# Altium PCB PCB1.PcbDoc
Units mm, origin at the board's own origin, x right, y up, seen from the top; angles counter-clockwise.
Board outline 59.87 x 40 mm, 2 copper layers (Top Layer, Bottom Layer); 39 components, 48 nets, 158 pads, 71 vias.
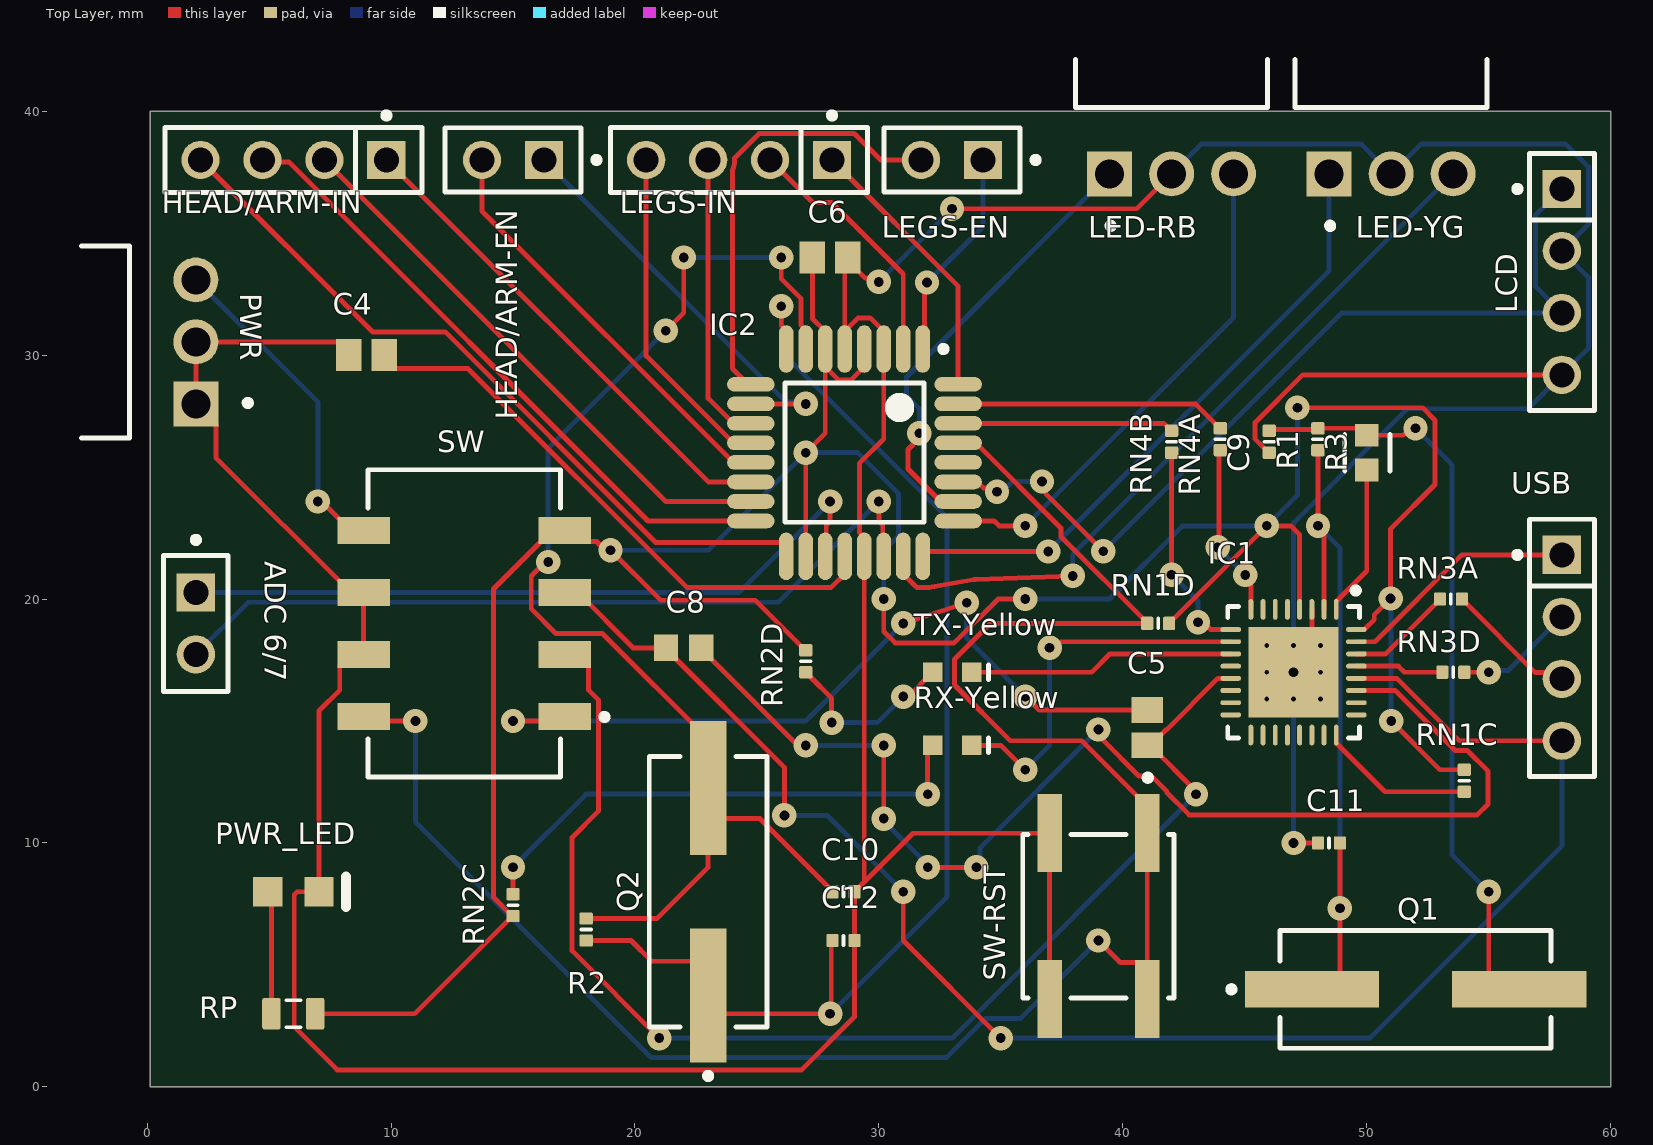
[diagram p0: Top Layer view]
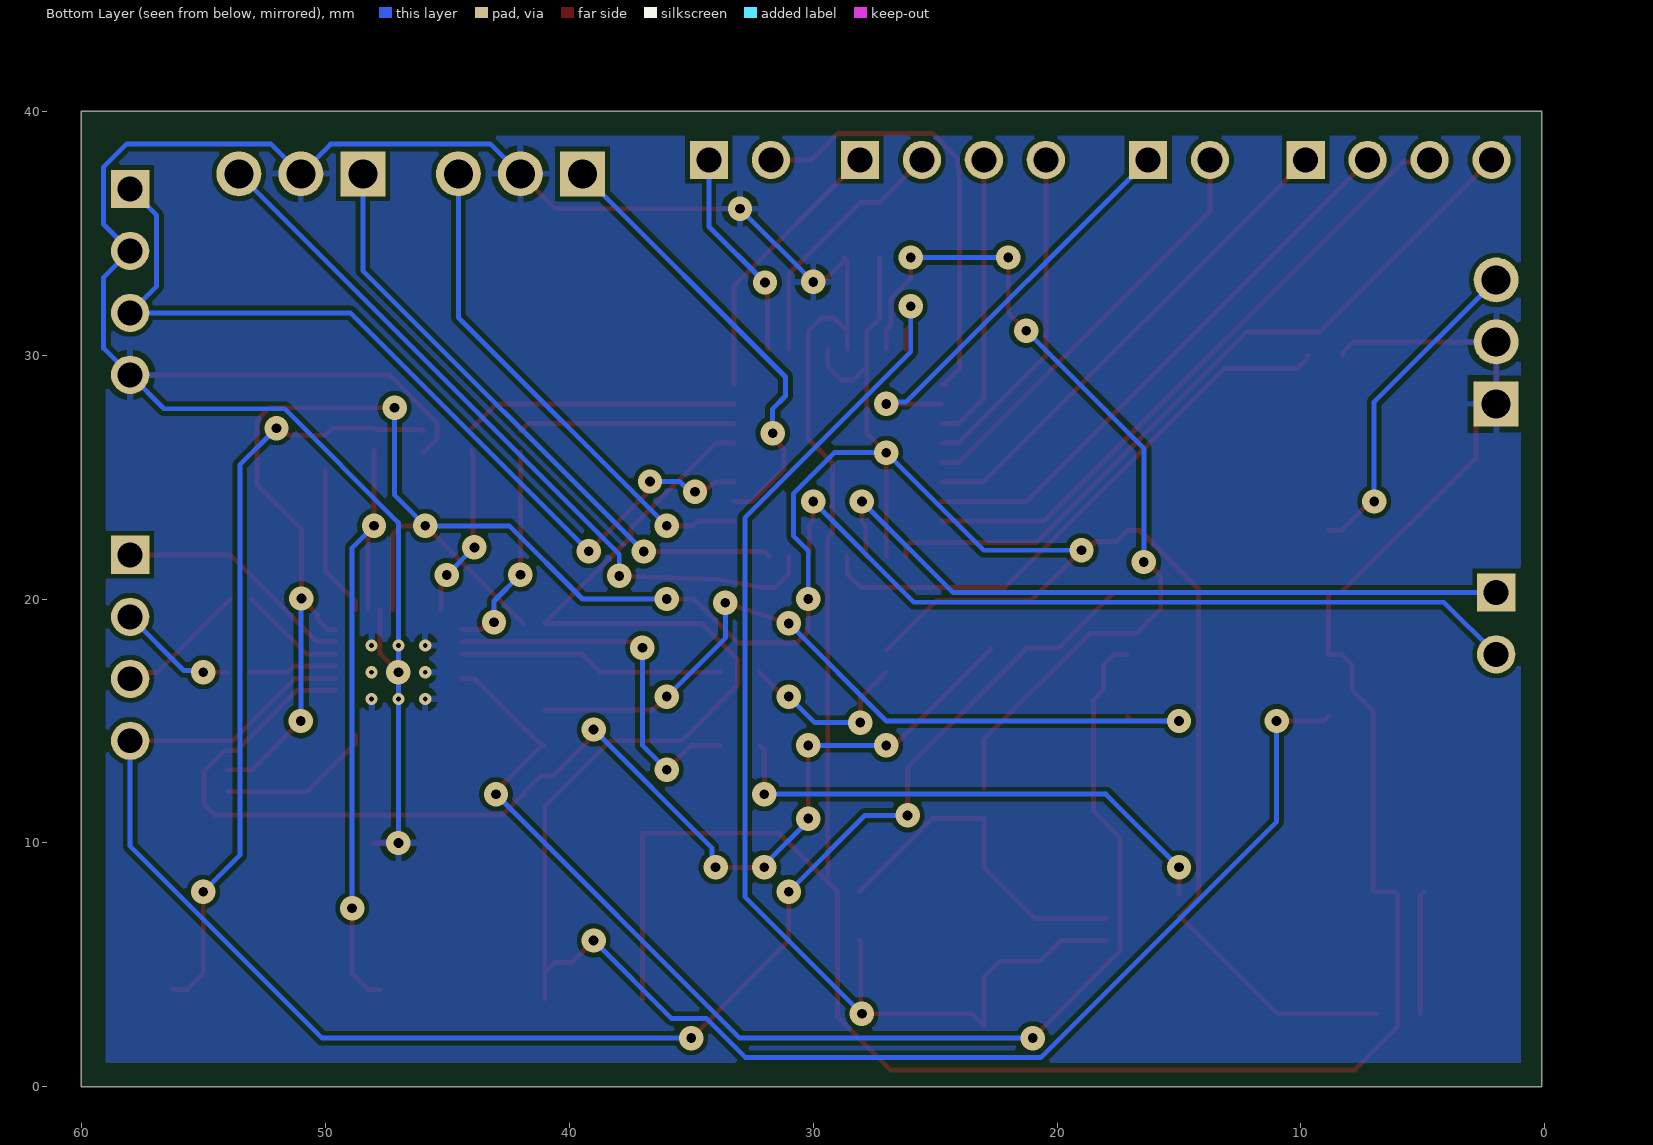
[diagram p1: Bottom Layer view, seen from below]
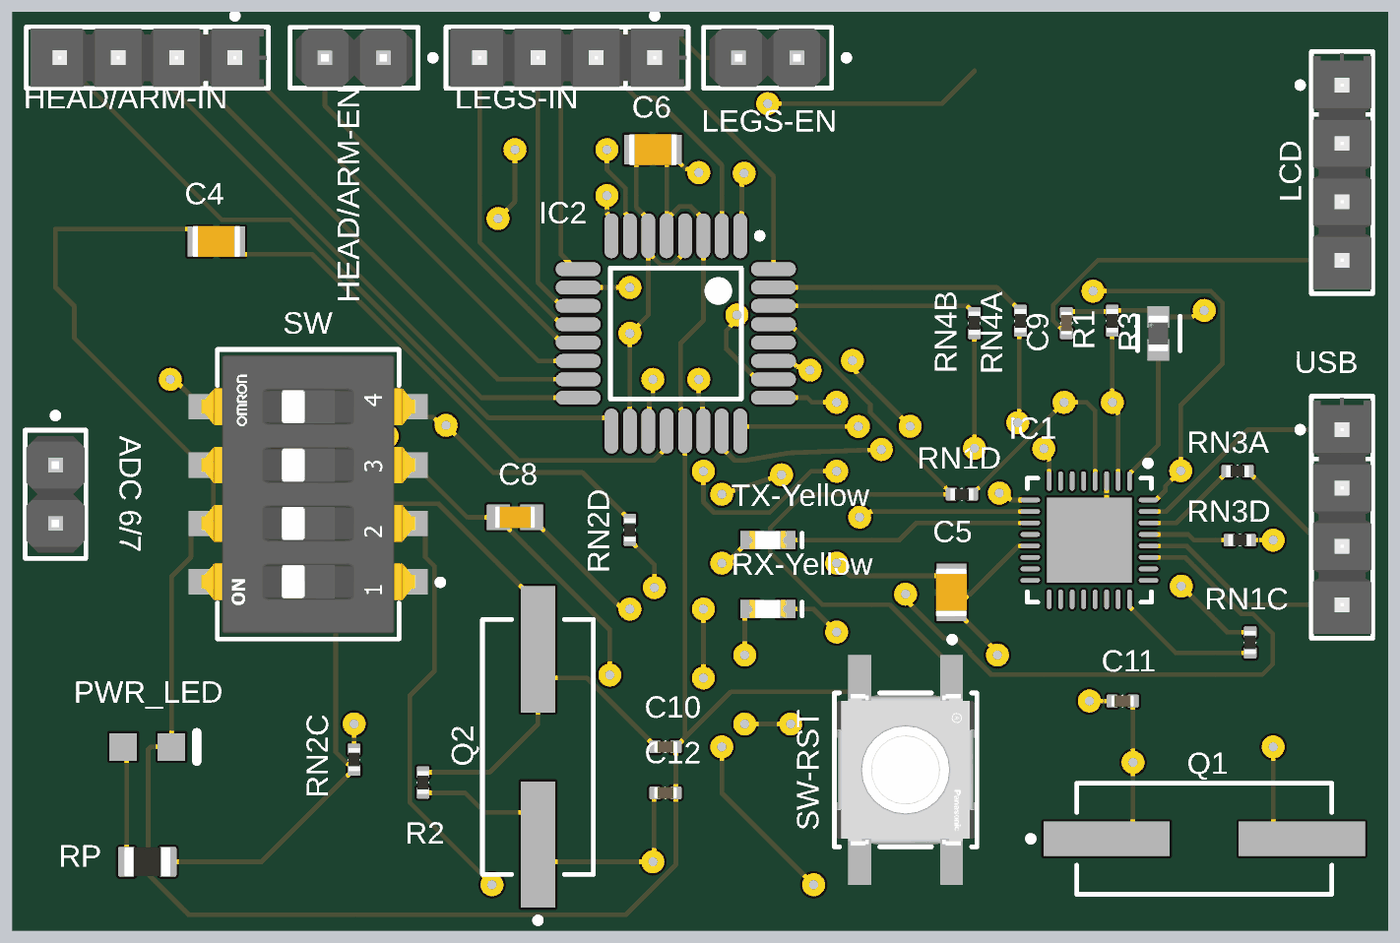
[diagram p2: 3D render of the assembled board from above, using the file's embedded part models]

## Layer stack, top to bottom
Top Solder: solder mask 0.0102, Solder Resist, Dk 3.5
Top Layer: signal copper 0.0356
Dielectric 1: dielectric 0.32, FR-4, Dk 4.8
Bottom Layer: signal copper 0.0356
Bottom Solder: solder mask 0.0102, Solder Resist, Dk 3.5

## Board outline
0.127,0 60,0 60,40 0.127,40

## Design rules (kind name [scope] priority, off if disabled: settings)
Clearance [All] p1: gap=0.2 ignorepadtopadclearanceinfootprint=TRUE
PolygonConnect [All] p1: connectstyle=Relief reliefconductorwidth=0.254 reliefentries=4 polygonreliefangle="90 Angle" airgapwidth=0.254
RoutingVias [All] p1: holewidth=0.4 width=1 viastyle="Through Hole" minholewidth=0.4 minwidth=1 maxholewidth=0.4 maxwidth=1
SMDNeckDown [All] p1: percent=50.000
SolderMaskExpansion [All] p1: expansion=0.102 istentingtop=FALSE
UnRoutedNet [All] p1: checkbadconnections=TRUE
Width [All] p1: maxlimit=0.3 minlimit=0.2 preferedwidth=0.2
29 further rules are at their usual default settings.

## Components (designator, comment, footprint, x,y, rotation, side; value= is the part's Value field where it differs from the comment)
"ADC 6/7" "M20-9990246" FP-M20-9990246-MFG 2,19 r270 top
C4 "Capacitor 100 nF +/-10% 50 V 0805" CAPC2013X95X50LL10T25 9,30 r0 top value=100nF
C5 "Capacitor 100 nF +/-10% 50 V 0805" CAPC2013X95X50LL10T25 41,14.725 r270 top value=100nF
C6 "Capacitor 100 nF +/-10% 50 V 0805" CAPC2013X95X50LL10T25 28,34 r180 top value=100nF
C8 "Capacitor 1uF +/- 10% 16V 0603" CAPC1608X90X35ML15T15 22,18 r0 top value=1µF
C9 "Capacitor 22pF +/-10% 50V 0402" CAPC0402(1005)60_L 46,26.45 r90 top value=22pF
C10 "Capacitor 22pF +/-10% 50V 0402" CAPC0402(1005)60_L 28.55,8 r0 top value=22pF
C11 "Capacitor 22pF +/-10% 50V 0402" CAPC0402(1005)60_L 48.45,10 r0 top value=22pF
C12 "Capacitor 22pF +/-10% 50V 0402" CAPC0402(1005)60_L 28.55,6 r0 top value=22pF
HEAD/ARM-EN "M20-9990246" FP-M20-9990246-MFG 15,38 r180 top
HEAD/ARM-IN "TSW-104-23-T-S" FP-TSW-104-23-T-S-MFG 6,38 r180 top
IC1 "ATmega8U2-MU" 32PG_M 47,17 r270 top
IC2 "ATmega328P-AU" 32A_M 29,26 r270 top
LCD "TSW-104-23-T-S" FP-TSW-104-23-T-S-MFG 58,33 r270 top
LED-RB "22-05-7038" FP-22-05-7038-MFG 42,46 r0 top
LED-YG "22-05-7038" FP-22-05-7038-MFG 51,46 r0 top
LEGS-EN "M20-9990246" FP-M20-9990246-MFG 33,38 r180 top
LEGS-IN "TSW-104-23-T-S" FP-TSW-104-23-T-S-MFG 24.27,38 r180 top
PWR "22-05-7038" FP-22-05-7038-MFG -6.57,30.54 r90 top
PWR_LED "HSMG-C170" AVAG-HSMX-C170_V 6,8 r0 top
Q1 "ATS16ASM-1" CTS-ATS-SM-XTAL-2 52,4 r0 top
Q2 "ATS16ASM-1" CTS-ATS-SM-XTAL-2 23,8 r90 top
R1 "Resistor 1M +/-5 % 0402 63 mW" RESC0402(1005)_L 48,26.55 r90 top value=1M
R2 "Resistor 1M +/-5 % 0402 63 mW" RESC0402(1005)_L 18,6.45 r90 top value=1M
R3 "CRCW060327R0JNEA" FP-CRCW0603-e3-IPC_B 50,26 r90 top
RN1C "Resistor 10K  +/-1 % 0402 63 mW" RESC0402(1005)_L 54,12.55 r90 top value=10k
RN1D "Resistor 10K  +/-1 % 0402 63 mW" RESC0402(1005)_L 41.45,19 r180 top value=10k
RN2C "Resistor 1K +/-5 % 0402 63 mW" RESC0402(1005)_L 15,7.45 r270 top value=1k
RN2D "Resistor 1K +/-5 % 0402 63 mW" RESC0402(1005)_L 27,17.45 r90 top value=1k
RN3A "Resistor 22R  +/-5 % 0402 63 mW" RESC0402(1005)_L 53.45,20 r180 top value=22
RN3D "Resistor 22R  +/-5 % 0402 63 mW" RESC0402(1005)_L 53.55,17 r180 top value=22
RN4A "Resistor 1K +/-5 % 0402 63 mW" RESC0402(1005)_L 44,26.55 r90 top value=1k
RN4B "Resistor 1K +/-5 % 0402 63 mW" RESC0402(1005)_L 42,26.45 r90 top value=1k
RP "Resistor 1K +/-5% 0805 125 mW" RESC0805(2012)_L 6,3 r0 top value=1k
RX-Yellow "150060YS75000" 0603_A 33,14 r180 top
SW "A6SN-4101" FP-A6SN-4101-MFG 13,19 r180 top
SW-RST "EVQ-Q2P03W" FP-EVQ-Q2P03W-MFG 39,7 r270 top
TX-Yellow "150060YS75000" 0603_A 33,17 r180 top
USB "TSW-104-23-T-S" FP-TSW-104-23-T-S-MFG 58,18 r270 top

## Footprints (in the part's own frame and the unit in brackets; to place one, negate y for a bottom-side part, rotate by r counter-clockwise, add the part's x,y. Pads: shape width x height; smd on the part's side, far side on the other; paste and mask are expansions set on the pad)
32A_M [mm] "Thin QFP, 32-Leads, Body 7x7mm, Pitch 0.8mm, IPC Low Density"
  oval 1.95x0.6 smd: 1(-4.25,2.8) 2(-4.25,2) 3(-4.25,1.2) 4(-4.25,0.4) 5(-4.25,-0.4) 6(-4.25,-1.2) 7(-4.25,-2) 8(-4.25,-2.8) 17(4.25,-2.8) 18(4.25,-2) 19(4.25,-1.2) 20(4.25,-0.4) 21(4.25,0.4) 22(4.25,1.2) 23(4.25,2) 24(4.25,2.8)
  oval 0.6x1.95 smd: 9(-2.8,-4.25) 10(-2,-4.25) 11(-1.2,-4.25) 12(-0.4,-4.25) 13(0.4,-4.25) 14(1.2,-4.25) 15(2,-4.25) 16(2.8,-4.25) 25(2.8,4.25) 26(2,4.25) 27(1.2,4.25) 28(0.4,4.25) 29(-0.4,4.25) 30(-1.2,4.25) 31(-2,4.25) 32(-2.8,4.25)
  silkscreen extent -4.37,-2.85 2.85,3.78, body extent -3.5,-3.5 3.5,3.5, height 1.2
32PG_M [mm] "QFN, 32-Leads, Body 5x5mm, Pitch 0.5mm, Thermal Pad 3.7x3.7mm, IPC Low Density"
  oval 0.85x0.2 smd: 1(-2.575,1.75) 2(-2.575,1.25) 3(-2.575,0.75) 4(-2.575,0.25) 5(-2.575,-0.25) 6(-2.575,-0.75) 7(-2.575,-1.25) 8(-2.575,-1.75) 17(2.575,-1.75) 18(2.575,-1.25) 19(2.575,-0.75) 20(2.575,-0.25) 21(2.575,0.25) 22(2.575,0.75) 23(2.575,1.25) 24(2.575,1.75)
  oval 0.2x0.85 smd: 9(-1.75,-2.575) 10(-1.25,-2.575) 11(-0.75,-2.575) 12(-0.25,-2.575) 13(0.25,-2.575) 14(0.75,-2.575) 15(1.25,-2.575) 16(1.75,-2.575) 25(1.75,2.575) 26(1.25,2.575) 27(0.75,2.575) 28(0.25,2.575) 29(-0.25,2.575) 30(-0.75,2.575) 31(-1.25,2.575) 32(-1.75,2.575)
  rect 3.7x3.7 smd: 33(0,0)
  silkscreen extent -3.47,-2.7 2.7,2.7, body extent -2.55,-2.55 2.55,2.55, height 1
0603_A [mm] "Chip LED, 2-Leads, Body 1.6x0.8mm, IPC Medium Density"
  rect 0.8x0.8 smd: 1(-0.8,0) 2(0.8,0)
  silkscreen extent -1.5,-0.3 -1.5,0.3, body extent -0.8,-0.4 0.8,0.4, height 0.7
AVAG-HSMX-C170_V [mm] "SMD, 2-Leads, Body 2x1.25mm, Height 0.8mm"
  rect 1.2x1.2 smd: 1(-1.05,0) 2(1.05,0)
  silkscreen extent 2.15,-0.63 2.15,0.63, body extent -1,-0.63 1,0.63, height 0.8
CAPC0402(1005)60_L [mm] "Chip Capacitor, Body 1.0x0.5mm, Height 0.6mm, IPC High Density"
  rrect25% 0.5x0.55 smd: 1(-0.45,0) 2(0.45,0)
  silkscreen extent 0,-0.2 0,0.2, body extent -0.5,-0.25 0.5,0.25, height 0.6
CAPC1608X90X35ML15T15 [mm] "Chip Capacitor, 2-Leads, Body 1.75x0.95mm, IPC Low Density"
  rect 1x1.1 smd: 1(-0.725,0) 2(0.725,0)
  body extent -0.87,-0.48 0.87,0.48, height 0.9
CAPC2013X95X50LL10T25 [mm] "Chip Capacitor, 2-Leads, Body 2.10x1.35mm, IPC High Density"
  rect 1.05x1.3 smd: 1(-0.725,0) 2(0.725,0)
  body extent -1.05,-0.67 1.05,0.67, height 0.95
CTS-ATS-SM-XTAL-2 [mm] "SMD, 2-Leads, Body 11.1x4.83mm, Pitch 8.5mm"
  rect 5.5x1.5 smd: 1(-4.25,0) 2(4.25,0)
  silkscreen extent -7.67,-2.41 5.55,2.42, body extent -5.59,-2.42 5.59,2.42, height 4.3
FP-22-05-7038-MFG [mm]
  rect 1.84x1.84 hole 1.19 paste-1000 mask+0: 1(-2.54,-8.57)
  round 1.84 hole 1.19 paste-1000 mask+0: 2(0,-8.57) 3(2.54,-8.57)
  silkscreen extent -3.94,-10.82 3.93,-3.87, body extent -4.04,-9.59 4.04,6.2, height 0.25
FP-A6SN-4101-MFG [mm]
  rect 2.15x1.1 smd paste+0 mask+0: 1(-4.125,3.81) 2(-4.125,1.27) 3(-4.125,-1.27) 4(-4.125,-3.81) 5(4.125,-3.81) 6(4.125,-1.27) 7(4.125,1.27) 8(4.125,3.81)
  silkscreen extent -5.88,-6.3 3.95,6.3, body extent -5.3,-6.4 5.3,6.4, height 0.25
FP-CRCW0603-e3-IPC_B [mm]
  rect 0.935x0.962 smd paste+0 mask+0: 1(-0.715,0) 2(0.715,0)
  silkscreen extent -0.75,-0.95 0.75,0.9, body extent -1.43,-0.73 1.43,0.73, height 0.25
FP-EVQ-Q2P03W-MFG [mm]
  rect 3.2x1 smd paste+0 mask+0: A(-3.4,2) A'(3.4,2) B(-3.4,-2) B'(3.4,-2)
  silkscreen extent -5.8,-3.1 3.35,3.1, body extent -5.1,-3.2 5.1,3.2, height 0.25
FP-M20-9990246-MFG [mm]
  rect 1.57x1.57 hole 1.02 paste-1000 mask+0: 1(-1.27,0)
  round 1.57 hole 1.02 paste-1000 mask+0: 2(1.27,0)
  silkscreen extent -3.55,-1.32 2.79,1.32, body extent -2.89,-1.42 2.89,1.42, height 0.25
FP-TSW-104-23-T-S-MFG [mm]
  rect 1.57x1.57 hole 1.02 paste-1000 mask+0: 1(-3.81,0)
  round 1.57 hole 1.02 paste-1000 mask+0: 2(-1.27,0) 3(1.27,0) 4(3.81,0)
  silkscreen extent -5.27,-1.95 5.27,1.33, body extent -5.37,-1.44 5.37,1.44, height 0.25
RESC0402(1005)_L [mm] "Chip Resistor, Body 1.0x0.5mm, IPC High Density"
  rrect25% 0.5x0.55 smd: 1(-0.45,0) 2(0.45,0)
  silkscreen extent 0,-0.2 0,0.2, body extent -0.5,-0.25 0.5,0.25, height 0.3
RESC0805(2012)_L [mm] "Chip Resistor, Body 2.0x1.3mm, IPC High Density"
  rrect25% 0.76x1.3 smd: 1(-0.9,0) 2(0.89,0)
  silkscreen extent -0.3,-0.55 0.3,0.55, body extent -1,-0.62 1,0.63, height 0.6

## Part data
"ADC 6/7" HEAD/ARM-EN LEGS-EN: library part CMP-15831-000009-1, "CONN HEADER VERT 2POS 2.54MM", Current Rating=3A, Manufacturer=Harwin, Temperature="-40°C to +105°C", Temperature Range High=+105°C, Temperature Range Low=-40°C, Automotive=No, Category=Conn, ComponentLink2Description=Datasheet, ComponentLink2URL=https://cdn.harwin.com/pdfs/M20-999.pdf, Conn Gender=Male, Conn Orientation=Vertical, Contact Material=Tin,Nickel, Device Class L1=Connectors, Device Class L2="Headers and Wire Housings", Device Class L3=unset, Digikey Description="CONN HEADER VERT 2POS 2.54MM", Height=8.99mm, Lead Free=Yes, Manufacturer Part Number=M20-9990246, Mouser Description="2.54mm (0.1\") Pitch SIL Vertical PC Tail Pin Header, 6.1mm mating pin height, tin, 2 contacts", Number of Contacts=2, Number of Rows=1, Octopart=https://octopart.com/m20-9990246-harwin-2590635, Package=M20-9990246, Pitch=2.54mm, RoHS=TRUE
C4 C5 C6: library part CMP-001-00018-6, "Chip Capacitor, 100 nF, +/- 10%, 50 V, 0805 (2012 Metric)", Capacitor Type=Ceramic, Case/Package=0805, Max Operating Temperature=125°C, Min Operating Temperature=-55°C, Tolerance=10%, Voltage Rating=50V, Mounting Technology=SM, Pins=2, RoHS Compliant=True
C8: library part CMP-001-00004-6, "Chip Capacitor, 1 uF, +/- 10%, 16 V, 0603 (1608 Metric)", Capacitor Type=Ceramic, Case/Package=0603, Max Operating Temperature=125°C, Min Operating Temperature=-55°C, Tolerance=10%, Voltage Rating=16V, Mounting Technology=SM, Pins=2, RoHS Compliant=True
C9 C10 C11 C12: library part CMP-001-00073-3, "Chip Capacitor, 22pF +/-10%, 50V, 0402, Thickness 0.6 mm", Case/Package=0402, Max Operating Temperature=85°C, Min Operating Temperature=-55°C, Tolerance=10%, Voltage Rating=50V, Mounting Technology=SMT, Pins=2
HEAD/ARM-IN LCD LEGS-IN USB: library part CMP-02766-001388-1, "CONN HEADER VERT 4POS 2.54MM", Color=Black, Max Current Rating=7.6A, Max Operating Temperature=105°C, Max Voltage Rating (AC)=550V, Min Operating Temperature=-55°C, Package Quantity=1, Connector Type="Male Pin", Contact Material=Bronze, Contact Mating Length=0.23inch, Contact Plating=Tin, Contact Type="Male Pin", Depth=2.54mm, Gender=Male, Housing Color=Black, Housing Material=Polyester, Lead Free="Lead Free", Length=10.16mm, Mount="Through Hole", Number of Contacts=4, Number of Positions=4, Number of Rows=1, Orientation=Straight, Packaging=Bulk, Pitch=2.54mm, Radiation Hardening=No, REACH SVHC="No SVHC", RoHS Compliant=Yes, Series=TSW, Termination=Solder, Width=2.54mm
IC1: library part CMP-0095-00113-3, "8-bit AVR Microcontroller, 2.7-5.5V, 8KB Flash, 512 Bytes EEPROM, 512 Bytes SRAM, 32-pin VQFN, Industrial Grade (-40°C to 85°C)", Code_JEDEC=MO-220WHHD-2, ComponentLink1Description="Manufacturer URL", ComponentLink1URL=http://www.atmel.com/, ComponentLink2Description="ATmega8U2/16U2/32U2 Datasheet", ComponentLink2URL=http://www.atmel.com/dyn/resources/prod_documents/doc7799.pdf, ComponentLink3Description="ATmega8U2/16U2/32U2 Summary", ComponentLink3URL=http://www.atmel.com/dyn/resources/prod_documents/7799S.pdf, DatasheetVersion="revD, Nov-2010", PackageDescription="32-Pin Quad Flat No-Lead (QFN) Sawn,  5 x 5 x 1.0 mm Body, Pitch 0.50 mm, 3.60mm Exposed Pad", PackageReference=32PG, PackageVersion="revA, Oct-2008", PartNumber=ATmega8U2-MU, RevisionNote="Schematic symbol corrected"
IC2: library part CMP-0095-00269-2, "8-bit AVR Microcontroller, 32KB Flash, 1KB EEPROM, 2KB SRAM, 32-pin TQFP, Industrial Grade (-40°C to 85°C)", Code_JEDEC=MS-026-ABA, ComponentLink1Description="Manufacturer URL", ComponentLink1URL=http://www.atmel.com/, ComponentLink2Description="ATmega48A/48PA/88A/88PA/168A/168PA/328/328P Datasheet", ComponentLink2URL=http://www.atmel.com/dyn/resources/prod_documents/doc8271.pdf, ComponentLink3Description="ATmega48A/48PA/88A/88PA/168A/168PA/328/328P Summary", ComponentLink3URL=http://www.atmel.com/dyn/resources/prod_documents/8271S.pdf, DatasheetVersion="revD, May-2011", PackageDescription="32-Lead, 7x7x1.0 mm Body, 0.8mm Lead Pitch, Thin Profile Plastic Quad Flat Package (TQFP)", PackageReference=32A, PackageVersion="revC, Oct-2010", RevisionNote="DatasheetVersion & PackageVersion updated. URLs added."
LED-RB LED-YG PWR: library part CMP-04776-000076-1, "CONN HEADER R/A 3POS 2.54MM", Current Rating=4A, Manufacturer=Molex, Package=0, Temperature="-40°C to +105°C", Temperature Range High=+105°C, Temperature Range Low=-40°C, Voltage Rating=500V, Automotive=No, Category=Conn, ComponentLink2Description=Datasheet, ComponentLink2URL=https://www.molex.com/webdocs/datasheets/pdf/en-us/0022057038_PCB_HEADERS.pdf, Conn Gender=Male, Conn Orientation="Right Angle", Contact Material=Tin,Nickel, Device Class L1=Connectors, Device Class L2="Headers and Wire Housings", Device Class L3=unset, Digikey Description="CONN HEADER R/A 3POS 2.54MM", Footprint Url=https://www.molex.com/pdm_docs/sd/022057038_sd.pdf, Height=6.05mm, Lead Free=Yes, Manufacturer Part Number=22-05-7038, Mouser Description="2.54mm (.100\") Pitch KK® Wire-to-Board Header, Right Angle, with Friction Lock, 3 Circuits", Number of Contacts=3, Number of Rows=1, Octopart=https://octopart.com/22-05-7038-molex-773563, Pitch=2.54mm, RoHS=TRUE
PWR_LED: library part CMP-2000-05062-1, "Chip LED, Green, 2.2 V, -40 to 85 degC, 2-Pin SMD, Pb-Free, Tape and Reel", Forward Current If=20mA, Forward Voltage=2.2V, Forward Voltage VF Max=2.6V, LED Colour=Green, Manufacturer=Avago, Operating Temperature Max=85degC, Operating Temperature Min=-30degC, Operating Temperature Range=-30degCto+85degC, Opto Case Style=SMD, Package Description="2-Pin Surface Mount Device, Body 2 x 1.25 mm, Height 0.8 mm", Package Reference=HSMX-C170, Storage Temperature Min=-40degC, Bulb Size=1.25mmx1.4mm, Datasheet URL=https://datasheet.ciiva.com/29280/180495-da-01-en-chip-led-hsmg-c170-gelb-gruen-29280971.pdf, Datasheet Version=Oct-08, Dominant Wavelength=572nm, Dominant Wavelength Typ=572nm, External Depth=0.8mm, External Length / Height=2mm, External Width=1.25mm, Forward Current If Max=20mA, LED Mounting=SMD, LED Type=Standard, Lens Shape=Rectangular, Light Area Height=1mm, Luminous Intensity=15mcd, Luminous Intensity Min=4mcd, Luminous Intensity Typ=15mcd, Manufacturer URL=http://www.avagotech.com/, Mounting Type=SMD, MSL=MSL2A-4weeks, No. of Pins=2, Opto Mounting Orientation=Top, Packaging=CutTape, Peak Forward Current=20mA, Peak Wavelength=570nm, PIV Max=5V, Storage Temperature Max=85degC, SVHC=NoSVHC(16-Jun-2014), Viewing Angle=170deg, Voltage Vf Typ=2.2V, Wavelength Typ=570nm
Q1 Q2: library part CMP-0585-00002-2, "ATS-SM Series Quartz Crystal, 16 MHz, -20 to 70 degC, 11.1 x 4.83 x 4.3mm SMD, RoHS, Tape and Reel", Frequency="16 MHz", Manufacturer="CTS Corporation", Operating Temperature="-20 to 70 degC", Shunt Capacitance (C0)="7.0 pF Max", ComponentLink1Description="Manufacturer URL", ComponentLink1URL=http://www.ctscorp.com/, ComponentLink2Description=Datasheet, ComponentLink2URL=http://www.ctscorp.com/components/Datasheets/008-0309-0.pdf, ComponentLink3Description="Package Specification", ComponentLink3URL=http://www.ctscorp.com/components/Datasheets/008-0309-0.pdf, Crystal Cut=AT-Cut, DatasheetVersion="Rev. K", Drive Level (Type)="100 uW", ESR Maximum="40 Ohms", Mounting Technology="Surface Mount", Oscillation Mode="Fundamental or 3rd Overtone", PackageDescription="2-Pin SMD, Body 11.1 x 4.83 mm, Pitch 8.5 mm", PackageReference=ATS-SM-XTAL-2, Packing="Tape and Reel", PartNumber=ATS16ASM-1, RoHS=TRUE
R1 R2: library part CMP-009-00151-3, "Chip Resistor, 1 MOhms, +/-5 %, 63 mW, -55 to 155 degC, 0402", Case/Package=0402, Max Operating Temperature=155°C, Min Operating Temperature=-55°C, Power=63mW, Tolerance=5%, Pins=2
R3: library part CMP-2000-03145-2, "RES Thick Film, 27Ω, 5%, 0.1W, 200ppm/°C, 0603", Case Code (Imperial)=0603, Case Code (Metric)=1608, Max Operating Temperature=155°C, Max Power Dissipation=100mW, Min Operating Temperature=-55°C, Package Quantity=1, Resistance=27R, Temperature Coefficient=200ppm/°C, Tolerance=5%, Voltage Rating=75V, Case/Package=0603, Composition="Thick Film", Contact Plating=Tin, Depth=0.85mm, Features="Automotive AEC-Q200", Height=0.45mm, Lead Free="Lead Free", Length=1.55mm, Military Standard=Not, Number of Pins=2, Number of Terminations=2, Packaging="Tape and Reel", Power Rating=100mW, Radiation Hardening=No, Termination=Solder, Voltage Rating (DC)=75V, Weight=7.1E-05oz, Width=0.85mm
RN1C RN1D: library part CMP-009-00149-3, "Chip Resistor, 10 kOhms, +/-1 %, 63 mW, -55 to 125 degC, 0402", Case/Package=0402, Max Operating Temperature=155°C, Min Operating Temperature=-55°C, Power=63mW, Tolerance=1%, Pins=2
RN2C RN2D RN4A RN4B: library part CMP-009-00157-3, "Chip Resistor, 1 kOhms, +/-5 %, 63 mW, -55 to 155 degC, 0402", Case/Package=0402, Max Operating Temperature=155°C, Min Operating Temperature=-55°C, Power=63mW, Tolerance=5%, Pins=2
RN3A RN3D: library part CMP-009-00164-3, "Chip Resistor, 22 Ohms, +/-5 %, 63 mW, -55 to 155 degC, 0402", Case/Package=0402, Max Operating Temperature=155°C, Min Operating Temperature=-55°C, Power=63mW, Tolerance=5%, Pins=2
RP: library part CMP-009-00118-3, "Chip Resistor, 1 kOhms, +/-5%, 125 mW, -55 to 155 degC, 0805", Case/Package=0805, Max Operating Temperature=155°C, Min Operating Temperature=-55°C, Power=125mW, Tolerance=5%, Pins=2
RX-Yellow TX-Yellow: library part CMP-1426-00005-1, "SMD mono-color Chip LED, WL-SMCW, Yellow", Color=Yellow, Manufacturer="Wuerth Elektronik", ComponentLink1Description="Manufacturer URL", ComponentLink1URL=http://www.we-online.com, ComponentLink2Description=Datasheet, ComponentLink2URL=http://katalog.we-online.com/led/datasheet/150060YS75000.pdf, PackageReference=0603_A, PartNumber=150060YS75000
SW: library part CMP-08827-000051-1, "RESET-EN", Contact Current Rating=25mA, Contact Resistance=200mR, Max Operating Temperature=85°C, Max Voltage Rating (DC)=24V, Min Operating Temperature=-30°C, Package Quantity=35, Actuator Length=1mm, Actuator Type="Slide (Standard)", Contact Material=Gold, Current Rating=25mA, Depth=9.3mm, Electrical Life=1000Cycles, Height=3.5mm, Length=0.476inch, Max Current Rating=25mA, Mechanical Life=1000Cycles, Mount="Surface Mount", Number of Circuits=4, Number of Positions=4, Orientation=Straight, Packaging=Rail/Tube, Pitch=0.1inch, Radiation Hardening=No, RoHS Compliant=Yes, Series=A6SN, Terminal Pitch=2.54mm, Termination="Gull Wing", Throw Configuration=SPST, Voltage Rating (DC)=24V, Washable=Yes, Weight=0.55g, Width=7.5mm
SW-RST: library part CMP-05618-000082-1, "SWITCH TACTILE SPST-NO 0.02A 15V", Actuator Color=White, Case/Package=SMD/SMT, Contact Current Rating=20mA, Contact Resistance=100mR, Max Operating Temperature=85°C, Max Voltage Rating (DC)=15V, Min Operating Temperature=-40°C, Operating Force=1.6N, Package Quantity=1, Voltage Rating (AC)=250V, Actuator Length=1.3mm, Actuator Type=Standard, Body Depth=6mm, Color=White, Current Rating=20mA, Depth=6.6mm, Electrical Life=1000000Cycles, Height=3.1mm, Illumination Type=Non-Illuminated, Lead Free="Lead Free", Length=6mm, Max Current Rating=20mA, Mechanical Life=1000000Cycles, Mount="Surface Mount", Number of Poles=1, Orientation=Straight, Packaging="Tape and Reel", Radiation Hardening=No, Series=EVQQ2, Size=1.8mm, Switch Function=Off-Mom, Switch Travel=0.25mm, Termination=SMD/SMT, Thickness=1.8mm, Throw Configuration=SPST, Voltage Rating (DC)=15V, Width=6.5mm

## Via types
v1: diameter 1, hole 0.4, Top Layer to Bottom Layer, 62 vias
v2: diameter 0.5, hole 0.2, Top Layer to Bottom Layer, 9 vias

## Nets (pads, with @x,y where several pads share a name; then routed paths per layer and width w, separated by ;. In a path a pad name is that pad's centre, name@x,y a point inside that pad or via, vN(x,y) a via of type N, cw(c..) or ccw(c..) an arc to the next point about the centre after c; other vN are vias at no path point)
5V_IN: PWR.3 SW.5 | length 13.5
  Top Layer w0.2: v1(7,24) 7.16,24 8.35,22.81 SW.5
  Bottom Layer w0.2: PWR.3 7,28.08 v1(7,24)
+5V: C6.2 IC1.4 IC1.32 IC2.4 IC2.6 IC2.18 RN1C.2 RN1D.1 RN2C.2 RN2D.2 RP.2 SW.4 | length 133.3
  Top Layer w0.2: RP.2 10.975,3 RN2C.2@14.975,7 ; RN2C.2 RN2C.2@14.975,7 ; RN2D.2 26.975,17.9 24.927,19.948 21.052,19.948 v1(19,22) 18.784,22 18.424,22.36 17.575,22.36 SW.4 16.6,22.81 14.2,20.41 14.2,7.775 RN2C.2@14.975,7 ; IC2.18 v1(27,26) 27.8,26.8 IC2.6@27.8,29.526 ; C6.2 27.275,31.499 27.8,30.974 IC2.6 IC2.6@27.8,29.526 ; IC2.4 29.4,29.526 28.849,28.975 28.351,28.975 IC2.6@27.8,29.526 ; v1(30.2,20) 30.2,18.669 30.669,18.2 33.088,18.2 34.888,20 v1(36,20) ; RN1D.1 41.95,19.05 41.95,19.075 42.05,19.175 42.075,19.175 v1(45.9,23) 46.883,23 47.25,22.633 IC1.4 ; v1(47.159,27.841) 52.291,27.841 52.8,27.331 52.8,24.696 50.978,22.874 v1(50.978,20.022) 50.308,19.352 50.308,19.158 49.9,18.75 IC1.32 ; v1(51,15) 53,13 RN1C.2 RN1C.2@54.025,13
  Bottom Layer w0.2: v1(19,22) 23,22 v1(27,26) 29.131,26 30.8,24.331 30.8,22.574 30.2,21.974 v1(30.2,20) ; v1(36,20) 39.453,20 42.453,23 v1(45.9,23) 47.159,24.259 v1(47.159,27.841) ; v1(50.978,20.022) 50.989,20.011 50.989,15.011 v1(51,15)
D2: IC2.32 LEGS-IN.1 | length 11.3
  Top Layer w0.2: LEGS-IN.1 33.25,32.83 IC2.32
D3: IC2.1 LEGS-EN.1 | length 8.8
  Top Layer w0.2: IC2.1 31.877,30.327 31.877,32.877 v1(31.974,32.974)
  Bottom Layer w0.2: v1(31.974,32.974) 34.27,35.27 LEGS-EN.1
D4: IC2.2 LEGS-IN.2 | length 10.5
  Top Layer w0.2: LEGS-IN.2 27.284,36.256 28.068,36.256 31,33.324 IC2.2
D5: IC2.9 LEGS-EN.2 | length 18.2
  Top Layer w0.2: IC2.9 24.557,28.8 24.557,28.883 24,29.44 24,37.579 ccw(c23,38) 24.085,38.003 24.085,38.079 25.091,39.085 28.989,39.085 30.074,38 LEGS-EN.2
D6: HEAD/ARM-EN.1 IC2.10 | length 17.1
  Top Layer w0.2: IC2.10 v1(27,28)
  Bottom Layer w0.2: HEAD/ARM-EN.1 26.2,28.07 26.93,28.07 v1(27,28)
D7: IC2.11 LEGS-IN.3 | length 11.9
  Top Layer w0.2: LEGS-IN.3 23,28.226 24.026,27.2 IC2.11
D8: IC2.12 LEGS-IN.4 | length 13.8
  Top Layer w0.2: LEGS-IN.4 20.46,29.966 24.026,26.4 IC2.12
D9: HEAD/ARM-EN.2 IC2.13 | length 17.4
  Top Layer w0.2: HEAD/ARM-EN.2 13.73,35.896 24.026,25.6 IC2.13
D10: HEAD/ARM-IN.1 IC2.14 | length 20.4
  Top Layer w0.2: HEAD/ARM-IN.1 23.01,24.8 IC2.14
D11: HEAD/ARM-IN.2 IC2.15 | length 23.3
  Top Layer w0.2: HEAD/ARM-IN.2 21.27,24 IC2.15
D12: HEAD/ARM-IN.3 IC2.16 | length 26.2
  Top Layer w0.2: HEAD/ARM-IN.3 4.809,37.921 5.815,37.921 20.536,23.2 IC2.16
D13: HEAD/ARM-IN.4 IC2.17 | length 31
  Top Layer w0.2: HEAD/ARM-IN.4 9.24,30.95 12.22,30.95 20.845,22.325 26.015,22.325 26.2,22.14 IC2.17
D+: RN3D.1 USB.2 | length 4.9
  Top Layer w0.2: RN3D.1 v1(55,17)
  Bottom Layer w0.2: v1(55,17) 55.07,17.07 55.8,17.07 USB.2
D-: RN3A.1 USB.3 | length 5.5
  Top Layer w0.2: RN3A.1 53.9,19.975 54.05,19.825 54.075,19.825 56.915,16.985 57.745,16.985 USB.3
GND: C4.1 C6.1 C9.1 C10.2 C11.1 C12.2 IC1.3 IC1.33 IC2.3 IC2.5 IC2.21 LCD.2 LCD.4 LED-RB.2 LED-YG.2 PWR.1 PWR.2 PWR_LED.2 SW-RST.B SW-RST.B' SW.6 SW.7 | length 204.1
  Top Layer w0.2: C4.1 8.275,30.115 7.85,30.54 PWR.2 PWR.1 2.82,27.18 2.82,25.8 8.35,20.27 SW.6 SW.7 8.35,17.73 7.9,17.28 7.9,16.264 7.05,15.414 PWR_LED.2 6.15,8 6.033,7.883 6.033,2.459 7.791,0.7 26.831,0.7 29,2.869 C12.2 C10.2 29,8.025 29.15,8.175 29.175,8.175 31.4,10.4 SW-RST.B SW-RST.B' ; IC2.5 IC2.5@28.6,30.974 ; 29.4,8.425 IC2.21 29.4,22.533 29.2,22.733 29.2,25.562 30.2,26.562 IC2.3 30.2,30.974 29.649,31.525 29.151,31.525 IC2.5@28.6,30.974 ; v1(30,33) 29.847,33.153 29.447,33.153 28.725,33.875 C6.1 28.6,33.875 IC2.5@28.6,30.974 ; v1(33,36) 40.57,36 LED-RB.2 ; C9.1 45.975,26 45.425,26.55 45.425,27.238 47.377,29.19 LCD.4 ; v1(47,10) C11.1 ; v2(47,17) 47.75,17.75 IC1.3
  Bottom Layer w0.2: v1(30,33) v1(33,36) ; LED-RB.2 43.22,38.65 49.78,38.65 LED-YG.2 52.22,38.65 58.154,38.65 59.085,37.719 59.085,35.355 LCD.2 59.085,33.185 59.085,30.275 LCD.4 56.61,27.8 51.669,27.8 47,23.131 v2(47,18.1) v2(47,17) v2(47,15.9) v1(47,10)
  other v1: 47,17
  other v2: 45.9,15.9 48.1,15.9 45.9,17 48.1,17 45.9,18.1 48.1,18.1
IO0: IC2.30 RN4B.2 | length 8.9
  Top Layer w0.2: IC2.30 41.675,27.2 41.975,26.9 RN4B.2
IO1: IC2.31 RN4A.2 | length 11.2
  Top Layer w0.2: IC2.31 42.975,28 43.975,27 RN4A.2
M8RXD: IC1.9 RN4B.1 | length 8.9
  Top Layer w0.2: v1(42,21) RN4B.1 ; v1(43.081,19.05) 43.298,19.05 43.598,18.75 IC1.9
  Bottom Layer w0.2: v1(42,21) 43.081,19.919 v1(43.081,19.05)
M8TXD: IC1.8 RN4A.1 | length 7.1
  Top Layer w0.2: v1(43.884,22.116) 43.942,22.174 43.942,26.042 RN4A.1 ; v1(45.016,20.984) 45.016,20.768 45.25,20.534 IC1.8
  Bottom Layer w0.2: v1(43.884,22.116) v1(45.016,20.984)
"NetADC 6/7_1": "ADC 6/7.1" IC2.19 | length 29.9
  Top Layer w0.2: IC2.19 27.843,21.793 27.843,23.025 28,23.182 v1(28,24)
  Bottom Layer w0.2: 2,20.27 24.27,20.27 v1(28,24)
"NetADC 6/7_2": "ADC 6/7.2" IC2.22 | length 32.9
  Top Layer w0.2: v1(30,24) 30,23.182 30.157,23.025 30.157,21.793 IC2.22
  Bottom Layer w0.2: 2,17.73 4.14,19.87 25.87,19.87 v1(30,24)
NetC4_2: C4.2 IC2.20 | length 23.8
  Top Layer w0.2: C4.2 9.725,29.875 10.15,29.45 13.154,29.45 22.129,20.475 28.049,20.475 28.6,21.026 IC2.20
NetC5_1: C5.1 SW.1 | length 32.7
  Top Layer w0.2: v1(15,15) 16.935,15 SW.1 ; v1(31,19) v1(33.6,19.843) ; v1(36,16) 36.031,16 36.581,15.45 C5.1
  Bottom Layer w0.2: v1(15,15) 27,15 v1(31,19) ; v1(33.6,19.843) 33.6,18.4 v1(36,16)
NetC5_2: C5.2 IC1.13 SW.2 | length 52
  Top Layer w0.2: SW.2 17.65,17.73 18.1,17.28 18.1,16.264 18.5,15.864 18.5,11.301 17.425,10.226 17.425,5.575 v1(21,2) ; C5.2 C5.2@41.125,14 ; v1(43,12) 43,12.125 C5.2@41.125,14 ; IC1.13 43.899,16.75 41.774,14.625 41.75,14.625 C5.2@41.125,14
  Bottom Layer w0.2: v1(21,2) 33,2 v1(43,12)
NetC8_2: C8.2 IC1.27 | length 50.5
  Top Layer w0.2: C8.2 22.725,17.95 26.522,14.153 26.847,14.153 v1(27,14) ; v1(30.2,11) v1(30.2,14) ; v1(32,9) v1(34,9) ; v1(39,14.65) 39.153,14.497 39.153,14.248 40.663,12.738 41.187,12.738 41.8,12.124 41.8,12.069 42.719,11.15 54.528,11.15 54.975,11.597 54.975,12.938 54.123,13.79 53.629,13.79 51.169,16.25 IC1.27
  Bottom Layer w0.2: v1(27,14) v1(30.2,14) ; v1(30.2,11) 30.2,10.9 32,9.1 v1(32,9) ; v1(34,9) 34.15,9.15 34.15,9.8 v1(39,14.65)
NetIC1_1: IC1.1 R3.1 | length 6.2
  Top Layer w0.2: IC1.1 48.75,19.9 50,21.15 R3.1
NetIC1_24: IC1.24 RN1C.1 | length 6.4
  Top Layer w0.2: IC1.24 48.75,14.1 50.75,12.1 RN1C.1
NetIC1_29: IC1.29 RN3D.2 | length 3.6
  Top Layer w0.2: IC1.29 51.3,17.25 51.55,17 RN3D.2
NetIC1_30: IC1.30 RN3A.2 | length 4.4
  Top Layer w0.2: IC1.30 50.775,17.75 53,19.975 RN3A.2
NetIC2_23: IC2.23 LED-YG.3 | length 30.9
  Top Layer w0.2: IC2.23 31,21.026 31.493,20.534 31.551,20.475 32.049,20.475 33.864,20.788 cw(c34,20) 33.97,20.799 v1(37.947,20.947)
  Bottom Layer w0.2: v1(37.947,20.947) 37.947,21.837 LED-YG.3
NetIC2_24: IC2.24 LED-YG.1 | length 25.5
  Top Layer w0.2: IC2.24 31.8,21.762 31.985,21.947 v1(36.947,21.947)
  Bottom Layer w0.2: v1(36.947,21.947) 48.46,33.46 LED-YG.1
NetIC2_25: IC2.25 LED-RB.3 | length 20.8
  Top Layer w0.2: IC2.25 34.732,23.2 34.932,23 v1(36,23)
  Bottom Layer w0.2: v1(36,23) 44.54,31.54 LED-RB.3
NetIC2_26: IC2.26 LED-RB.1 | length 18.6
  Top Layer w0.2: v1(31.658,26.8) 31.658,26.595 31.195,26.132 31.195,25.331 32.526,24 IC2.26
  Bottom Layer w0.2: v1(31.658,26.8) 31.658,27.795 31.131,28.322 31.131,29.101 LED-RB.1
NetIC2_27: IC2.27 LCD.1 LCD.3 | length 36.5
  Top Layer w0.2: IC2.27 34.033,24.8 34.279,24.554 34.688,24.554 v1(34.841,24.401) ; v1(36.687,24.818) 36.84,24.665 36.84,24.317 v1(39.199,21.958)
  Bottom Layer w0.2: v1(34.841,24.401) 35.057,24.401 35.475,24.818 v1(36.687,24.818) ; v1(39.199,21.958) 48.971,31.73 LCD.3 56.915,32.815 56.915,35.725 LCD.1
NetPWR_LED_1: PWR_LED.1 RP.1 | length 5.1
  Top Layer w0.2: PWR_LED.1 5.1,7.85 RP.1
NetRN2C_1: RN2C.1 RX-Yellow.2 | length 21.4
  Top Layer w0.2: RN2C.1 v1(15,9) ; v1(32,12) 32,13.8 RX-Yellow.2
  Bottom Layer w0.2: v1(15,9) 18,12 v1(32,12)
NetRN2D_1: RN2D.1 TX-Yellow.2 | length 7.5
  Top Layer w0.2: RN2D.1 27.025,17 27.175,16.85 27.175,16.825 28.066,15.934 v1(28.066,14.934) ; v1(31,16) 31.2,16 TX-Yellow.2
  Bottom Layer w0.2: v1(28.066,14.934) 29.934,14.934 v1(31,16)
RESET: IC2.29 RN1D.2 SW-RST.A SW-RST.A' SW.8 | length 81.3
  Top Layer w0.2: SW.8 9.065,15 v1(11,15) ; IC2.29 33.974,26.4 37.465,22.909 37.465,22.56 41,19.025 RN1D.2 34.576,19 33.1,17.524 33.1,16.476 35.388,14.188 38.312,14.188 41,11.5 SW-RST.A SW-RST.A'@41,4.7 ; v1(39,6) 39.9,5.1 40.6,5.1 SW-RST.A'@41,4.7 ; SW-RST.A' SW-RST.A'@41,4.7
  Bottom Layer w0.2: v1(11,15) 11,10.869 20.669,1.2 32.766,1.2 34.366,2.8 35.8,2.8 v1(39,6)
RXLED: IC1.10 RX-Yellow.1 | length 15.6
  Top Layer w0.2: RX-Yellow.1 35,14 v1(36,13) ; v1(37,18) 37.216,18 37.466,18.25 IC1.10
  Bottom Layer w0.2: v1(36,13) 37,14 v1(37,18)
TXLED: IC1.11 TX-Yellow.1 | length 10.9
  Top Layer w0.2: TX-Yellow.1 38.725,17 39.475,17.75 IC1.11
UGND: C8.1 IC1.28 SW.3 USB.4 | length 67.9
  Top Layer w0.2: SW.3 17.65,20.27 19.92,18 C8.1 21.275,17.95 26.128,13.097 v1(26.128,11.128) ; v1(31,8) 31,6 v1(35,2) ; IC1.28 51.234,16.75 53.794,14.19 USB.4
  Bottom Layer w0.2: v1(26.128,11.128) 27.872,11.128 v1(31,8) ; v1(35,2) 50.131,2 58,9.869 USB.4
UVCC: IC1.31 USB.1 | length 9.9
  Top Layer w0.2: IC1.31 50.337,18.25 53.897,21.81 USB.1
XT1: C9.2 Q1.2 R1.2 R3.2 | length 31.4
  Top Layer w0.2: C9.2 46.05,26.95 47.95,26.95 R1.2 49.715,27 R3.2 51.499,26.715 51.784,27 v1(52,27) ; v1(55,8) 55,4.65 55.65,4 Q1.2
  Bottom Layer w0.2: v1(52,27) 53.5,25.5 53.5,9.5 v1(55,8)
XT2: C11.2 IC1.2 Q1.1 R1.1 | length 29.1
  Top Layer w0.2: Q1.1 48.25,4 48.9,4.65 v1(48.9,7.325) C11.2 ; v1@48,23.05 R1.1 ; IC1.2 v1@48.25,22.8
  Bottom Layer w0.2: v1(48,23) 48.9,22.1 v1(48.9,7.325)
XTAL1: C10.1 IC2.7 Q2.2 R2.2 | length 50.9
  Top Layer w0.2: v1(16.441,21.52) 16.326,21.52 15.75,20.944 15.75,19.596 16.766,18.58 18.67,18.58 23,14.25 Q2.2 ; R2.2 20.9,6.9 23,9 23,11 25.125,11 28.1,8.025 C10.1 ; v1(21.26,31) 22,31.74 v1(22,34) ; v1(26,34) 26,33.131 26.8,32.331 26.8,31.233 27,31.033 IC2.7
  Bottom Layer w0.2: v1(16.441,21.52) 16.441,26.181 v1(21.26,31) ; v1(22,34) v1(26,34)
XTAL2: C12.1 IC2.8 Q2.1 R2.1 | length 51.5
  Top Layer w0.2: R2.1 19.837,6 20.688,5.15 22.35,5.15 23,4.5 23,2.5 23.5,3 v1(28,3) 28.05,3.05 28.05,5.95 C12.1 ; v1(26,32) 26,31.227 26.2,31.027 IC2.8
  Bottom Layer w0.2: v1(26,32) 26,30.131 32.8,23.331 32.8,7.8 v1(28,3)
pads on no net: IC1.5 IC1.6 IC1.7 IC1.12 IC1.14 IC1.15 IC1.16 IC1.17 IC1.18 IC1.19 IC1.20 IC1.21 IC1.22 IC1.23 IC1.25 IC1.26 IC2.28
copper on no net: | length 199.7
  Top Layer w0.001: 0.127,0 0.127,40 60,40 60,0 0.127,0

## Polygon pours and split planes (outlines as drawn)
GND on Bottom Layer "GND_PLANE" (solid, pour order 0): 1,39 1,1 59,1 59,39